# Altium PCB 4501-WB_AV_BMS_REV_A1.PcbDoc (part 1 of 2)
Units mil, origin at the board's own origin, x right, y up, seen from the top; angles counter-clockwise.
Board outline 3758.45 x 2809.6 mil, 2 copper layers (Top Layer, Bottom Layer), stack 65.792 mil thick; 104 components, 87 nets, 330 pads, 249 vias.
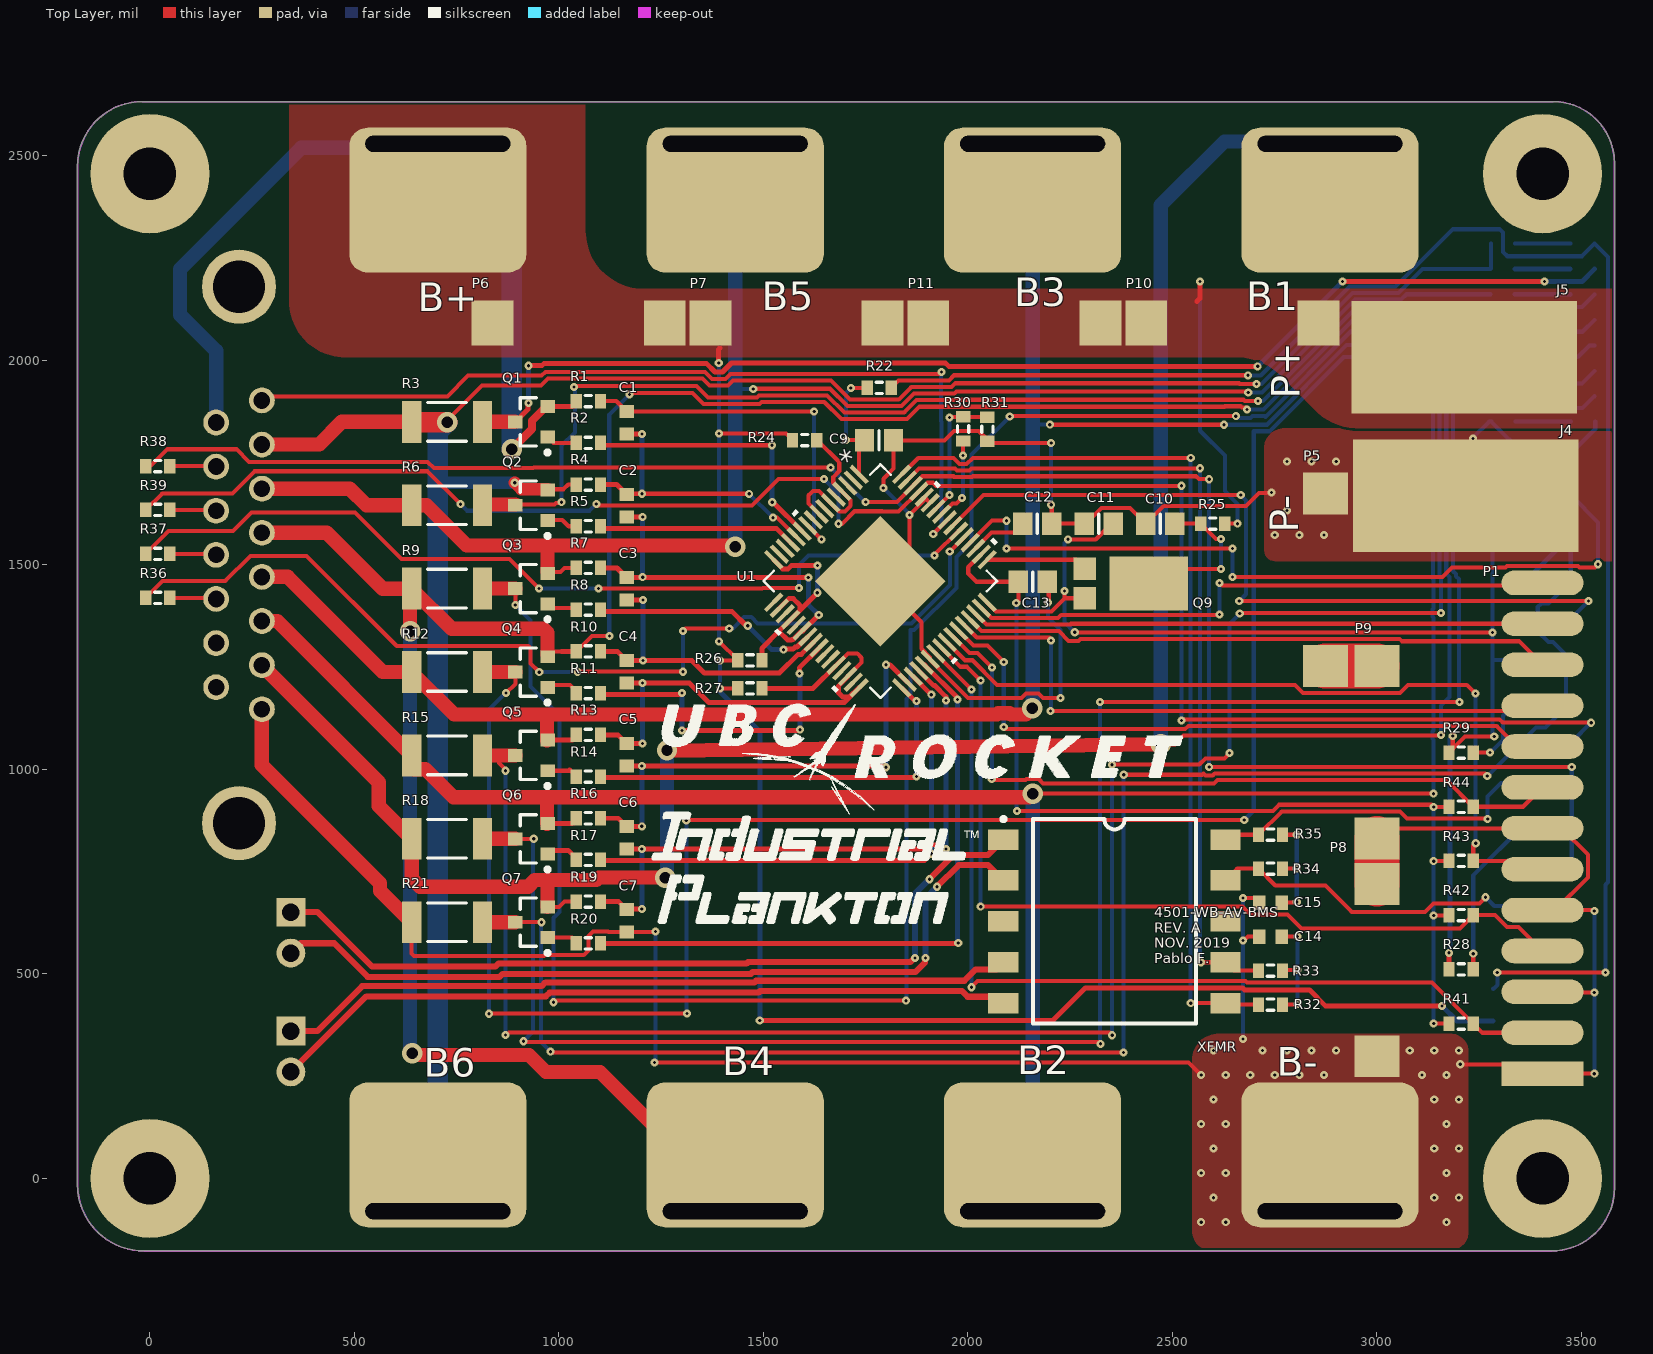
[diagram p0: Top Layer view]
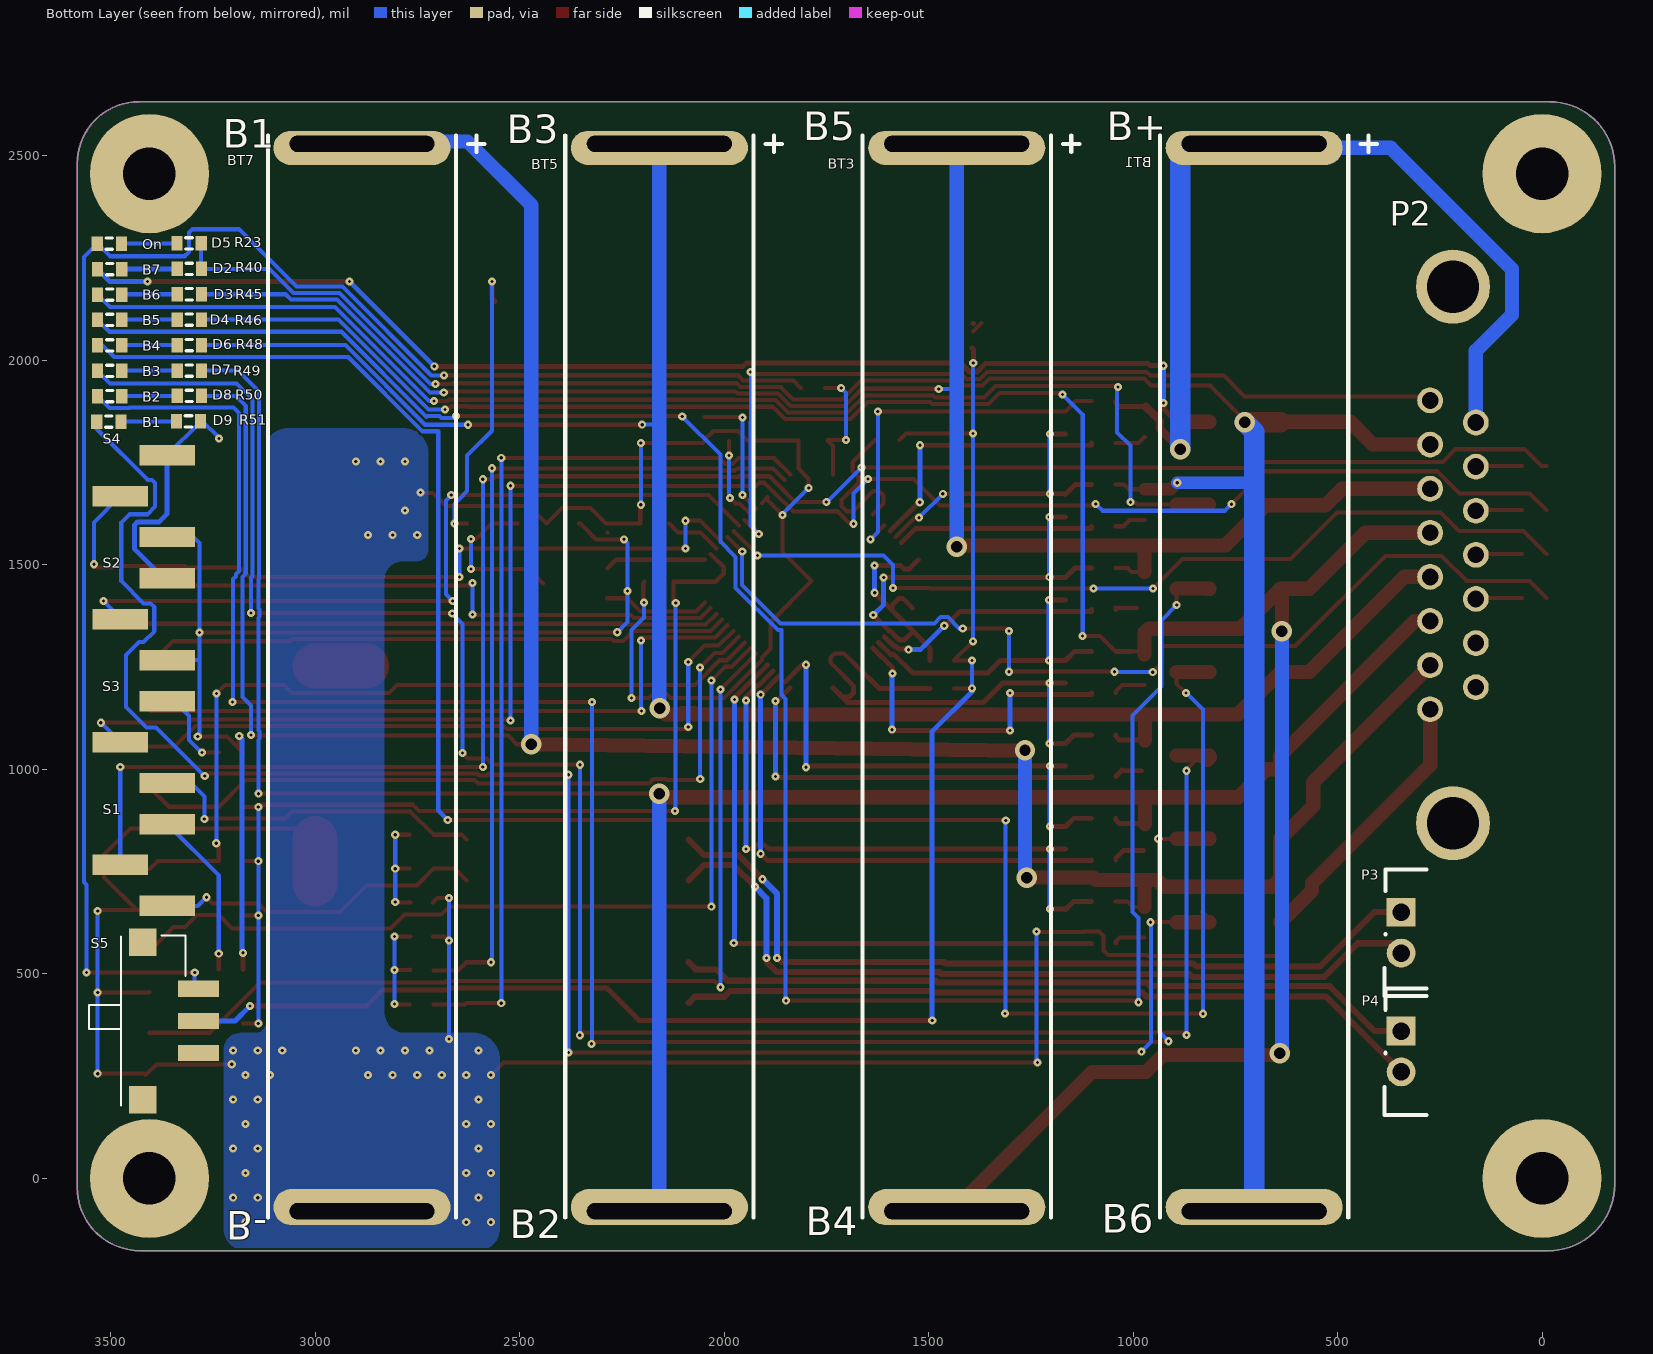
[diagram p1: Bottom Layer view, seen from below]

## Layer stack, top to bottom
Top Solder: solder mask 0.4, Solder Resist, Dk 3.5
Top Layer: signal copper 1.4
Dielectric 1: dielectric 62.9921, FR-4, Dk 4.8
Bottom Layer: signal copper 1.4
Bottom Solder: solder mask 0.4, Solder Resist, Dk 3.5

## Board outline
-15.2,-177.17 3427.8,-177.17 ccw(c3427.8,-23.67) 3581.3,-23.67 3581.3,2482.43 ccw(c3431.3,2482.43) 3431.3,2632.43 -19.3,2632.43 ccw(c-19.3,2474.59) -177.15,2474.59 -177.15,-15.22 ccw(c-15.2,-15.22)

## Design rules (kind name [scope] priority, off if disabled: settings)
Clearance [All] p1: gap=6 ignorepadtopadclearanceinfootprint=FALSE except(0: Arc-Hole Track-Hole SMDPad-Hole THPad-Hole Via-Hole Fill-Hole Poly-Hole Region-Hole Text-Hole)
ComponentClearance [All] p1: gap=0 collisioncheckmode=3 verticalgap=0.1 showdistances=FALSE
DiffPairsRouting [All] p1: maxlimit=10 minlimit=10 mostfreqgap=10 toplayer_minwidth=15 toplayer_maxwidth=15 toplayer_prefwidth=15 bottomlayer_minwidth=15 bottomlayer_maxwidth=15 bottomlayer_prefwidth=15 maxuncoupledlength=500
HoleSize [All] p1: absolutevalues=TRUE maxlimit=1000 minlimit=1 maxpercent=80.000 minpercent=20.000
MinimumSolderMaskSliver [All] p1: minsoldermaskwidth=1
PolygonConnect [All] p1: connectstyle=Direct reliefconductorwidth=10 reliefentries=4 polygonreliefangle="90 Angle" airgapwidth=10
RoomDefinition BMS_REV_A1 [InComponentClass('BMS_REV_A1')] p1: confinementstyle=ConfineIn formatcopy=TRUE lockcomponents=FALSE outline -406.65,-123.8 3624.85,-123.8 3624.85,2573 -406.65,2573
RoutingVias [All] p1: holewidth=7.87 width=19.87 viastyle="Through Hole" minholewidth=7.87 minwidth=19.87 maxholewidth=28 maxwidth=50
SilkToSilkClearance [All] p1: silktosilkclearance=1
SilkToSolderMaskClearance [IsPad] p1: minsilkscreentomaskgap=1 clearancetoexposedcopper=TRUE
SolderMaskExpansion [All] p1: expansion=4 istentingtop=FALSE
Width [All] p1: maxlimit=100 minlimit=10 preferedwidth=12
24 further rules are at their usual default settings.

## Classes and differential pairs
differential pair IB: +IB_P -IB_N
differential pair IA: +IA_P -IA_N

## Components (designator, comment, footprint, x,y, rotation, side; value= is the part's Value field where it differs from the comment)
BT1 "Battery" PCBComponent_1#1 704.05,-80.4 r90 bottom locked
BT3 "Battery" PCBComponent_1#1 1431.25,-80.4 r90 bottom locked
BT5 "Battery" PCBComponent_1#1 2158.45,-80.4 r90 bottom locked
BT7 "Battery" PCBComponent_1#1 2885.65,-80.4 r90 bottom locked
C1 "399-1092-1-ND" 1608[0603] 1165.4,1847.73 r90 top value=10nF
C2 "399-1092-1-ND" 1608[0603] 1165.4,1644.73 r90 top value=10nF
C3 "399-1092-1-ND" 1608[0603] 1165.4,1441.73 r90 top value=10nF
C4 "399-1092-1-ND" 1608[0603] 1165.4,1238.73 r90 top value=10nF
C5 "399-1092-1-ND" 1608[0603] 1165.4,1035.73 r90 top value=10nF
C6 "399-1092-1-ND" 1608[0603] 1165.4,832.73 r90 top value=10nF
C7 "399-1092-1-ND" 1608[0603] 1165.4,629.73 r90 top value=10nF
C9 "1276-1090-1-ND" 6-0805_N 1782.9,1804.33 r180 top value=100nF
C10 "1276-1090-1-ND" 6-0805_N 2470.22,1600.83 r0 top value=100nF
C11 "311-3498-1-ND" 6-0805_N 2319.96,1600.83 r0 top value=1uF
C12 "311-3498-1-ND" 6-0805_N 2169.7,1600.83 r180 top value=1uF
C13 "311-3498-1-ND" 6-0805_N 2158.9,1458.73 r180 top value=1uF
C14 "399-1092-1-ND" 1608[0603] 2739.95,591.08 r0 top value=10nF
C15 "399-1092-1-ND" 1608[0603] 2739.95,674.12 r0 top value=10nF
D2 "160-1435-1-ND" J1-0603 3502.5,2223.18 r180 bottom
D3 "160-1435-1-ND" J1-0603 3502.5,2161.02 r180 bottom
D4 "160-1435-1-ND" J1-0603 3502.5,2098.86 r180 bottom
D5 "LED0" J1-0603 3503.2,2285.33 r180 bottom
D6 "160-1435-1-ND" J1-0603 3502.5,2036.71 r180 bottom
D7 "160-1435-1-ND" J1-0603 3502.5,1974.55 r180 bottom
D8 "160-1435-1-ND" J1-0603 3502.5,1912.39 r180 bottom
D9 "160-1435-1-ND" J1-0603 3504.6,1850.23 r180 bottom
J4 "Socket" PCBComponent_1#2 3217,1668.73 r180 top
J5 "Socket" PCBComponent_1#2 3213.3,2007.83 r180 top
P1 "Header 13" PCBComponent_1#3 3405.05,255.91 r90 top
P2 "5747845-4" *5747845-4 217.9,868.63 r270 bottom
P3 "WM4900-ND" WM4900-ND 404.63,344.83 r180 bottom locked
P4 "WM4900-ND" WM4900-ND 404.63,54.13 r180 bottom locked
P5 "36-5104-ND" PCBComponent_1#4 2875,1253.13 r90 top
P6 "36-5104-ND" PCBComponent_1#4 1258.9,2091.53 r180 top
P7 "36-5104-ND" PCBComponent_1#4 1791.75,2091.53 r180 top
P8 "36-5104-ND" PCBComponent_1#4 3000.4,298.37 r90 top
P9 "36-5104-ND" PCBComponent_1#4 3000.5,831.37 r90 top
P10 "36-5104-ND" PCBComponent_1#4 2857.46,2091.53 r180 top
P11 "36-5104-ND" PCBComponent_1#4 2324.61,2091.53 r180 top
Q1 "BSS308PEH6327XTSA1CT-ND" SOT95P245X110-3N 932.95,1849.7 r180 top
Q2 "BSS308PEH6327XTSA1CT-ND" SOT95P245X110-3N 932.95,1645.8 r180 top
Q3 "BSS308PEH6327XTSA1CT-ND" SOT95P245X110-3N 932.95,1441.9 r180 top
Q4 "BSS308PEH6327XTSA1CT-ND" SOT95P245X110-3N 932.95,1238 r180 top
Q5 "BSS308PEH6327XTSA1CT-ND" SOT95P245X110-3N 932.95,1034.1 r180 top
Q6 "BSS308PEH6327XTSA1CT-ND" SOT95P245X110-3N 932.95,830.2 r180 top
Q7 "BSS308PEH6327XTSA1CT-ND" SOT95P245X110-3N 932.95,626.3 r180 top
Q9 "DXT5551P5-13CT-ND" DXT5551P5-13 2442.6,1454.63 r270 top
R1 "A129676CT-ND" J1-0603 1072.1,1900.4 r0 top value=100
R2 "A129543CT-ND" J1-0603 1072.1,1798.42 r0 top value=3.3k
R3 "A130642CT-ND" 12Z-2010 726.55,1849.7 r180 top value=33
R4 "A129676CT-ND" J1-0603 1072.1,1696.43 r0 top value=100
R5 "A129543CT-ND" J1-0603 1072.1,1594.44 r0 top value=3.3k
R6 "A130642CT-ND" 12Z-2010 726.55,1645.8 r180 top value=33
R7 "A129676CT-ND" J1-0603 1072.1,1492.45 r0 top value=100
R8 "A129543CT-ND" J1-0603 1072.1,1390.47 r0 top value=3.3k
R9 "A130642CT-ND" 12Z-2010 726.55,1441.9 r180 top value=33
R10 "A129676CT-ND" J1-0603 1072.1,1288.48 r0 top value=100
R11 "A129543CT-ND" J1-0603 1072.1,1186.49 r0 top value=3.3k
R12 "A130642CT-ND" 12Z-2010 726.55,1238 r180 top value=33
R13 "A129676CT-ND" J1-0603 1072.1,1084.5 r0 top value=100
R14 "A129543CT-ND" J1-0603 1072.1,982.52 r0 top value=3.3k
R15 "A130642CT-ND" 12Z-2010 726.55,1034.1 r180 top value=33
R16 "A129676CT-ND" J1-0603 1072.1,880.53 r0 top value=100
R17 "A129543CT-ND" J1-0603 1072.1,778.54 r0 top value=3.3k
R18 "A130642CT-ND" 12Z-2010 726.55,830.2 r180 top value=33
R19 "A129676CT-ND" J1-0603 1072.1,676.55 r0 top value=100
R20 "A129543CT-ND" J1-0603 1072.1,574.57 r0 top value=3.3k
R21 "A130642CT-ND" 12Z-2010 726.55,626.3 r180 top value=33
R22 "A129676CT-ND" J1-0603 1783.3,1932.93 r0 top value=100
R23 "RMCF2010JT33R0CT-ND" J1-0603 3308.4,2286.03 r180 bottom value=475
R24 "A129676CT-ND" J1-0603 1600.9,1805.13 r0 top value=100
R25 "A129676CT-ND" J1-0603 2598.83,1600.83 r0 top value=100
R26 "A129676CT-ND" J1-0603 1467.17,1266.33 r0 top value=100
R27 "A129676CT-ND" J1-0603 1467.17,1198.13 r0 top value=100
R28 "A129724CT-ND" J1-0603 3206.2,511.05 r180 top value=1M
R29 "A129724CT-ND" J1-0603 3206.2,1041.13 r180 top value=1M
R30 "RNCP0603FTD1K00CT-ND" J1-0603 1988.5,1832.43 r90 top value=1k
R31 "RNCP0603FTD1K00CT-ND" J1-0603 2047.65,1831.6 r270 top value=1k
R32 "311-2598-1-ND" J1-0603 2739.95,425 r0 top value=50
R33 "311-2598-1-ND" J1-0603 2739.95,508.04 r180 top value=50
R34 "311-2598-1-ND" J1-0603 2739.95,757.16 r0 top value=50
R35 "311-2598-1-ND" J1-0603 2739.95,840.2 r180 top value=50
R36 "A129676CT-ND" J1-0603 19.2,1419.33 r180 top value=100
R37 "A129676CT-ND" J1-0603 19.2,1526.8 r180 top value=100
R38 "A129676CT-ND" J1-0603 19.2,1741.73 r0 top value=100
R39 "A129676CT-ND" J1-0603 19.2,1634.27 r0 top value=100
R40 "RMCF2010JT33R0CT-ND" J1-0603 3307.7,2223.88 r0 bottom value=475
R41 "RNCP0603FTD10K0CT-ND" J1-0603 3206.2,378.53 r0 top value=10k
R42 "RNCP0603FTD10K0CT-ND" J1-0603 3206.2,643.57 r0 top value=10k
R43 "RNCP0603FTD10K0CT-ND" J1-0603 3206.2,776.09 r0 top value=10k
R44 "RNCP0603FTD10K0CT-ND" J1-0603 3206.2,908.61 r0 top value=10k
R45 "RMCF2010JT33R0CT-ND" J1-0603 3307.7,2161.72 r0 bottom value=475
R46 "RMCF2010JT33R0CT-ND" J1-0603 3307.7,2099.56 r0 bottom value=475
R48 "RMCF2010JT33R0CT-ND" J1-0603 3307.7,2037.41 r0 bottom value=475
R49 "RMCF2010JT33R0CT-ND" J1-0603 3307.7,1975.25 r0 bottom value=475
R50 "RMCF2010JT33R0CT-ND" J1-0603 3307.7,1913.09 r0 bottom value=475
R51 "RMCF2010JT33R0CT-ND" J1-0603 3309.8,1850.93 r0 bottom value=475
S1 "S9337-ND, SAM8981-ND" *TSM-103-01-L-SV 3419.18,766.33 r270 bottom
S2 "S9337-ND, SAM8981-ND" *TSM-103-01-L-SV 3419.32,1367.33 r270 bottom
S3 "S9337-ND, SAM8981-ND" *TSM-103-01-L-SV 3419.18,1066.63 r270 bottom
S4 "S9337-ND, SAM8981-ND" *TSM-103-01-L-SV 3419.32,1668.13 r270 bottom
S5 "SS312SAH4-R" *SW_SS312SAH4-R 3344.83,384.75 r180 bottom
U1 "LTC6812ILWE-1#3ZZPBF-ND" "LQFP64_LWE_A - duplicate" 1786.1,1460.33 r315 top value=Value
XFMR "1840-1032-1-ND" HM2100NLT 2087.1,828.33 r0 top

## Footprints (in the part's own frame and the unit in brackets; to place one, negate y for a bottom-side part, rotate by r counter-clockwise, add the part's x,y. Pads: shape width x height; smd on the part's side, far side on the other; paste and mask are expansions set on the pad)
6-0805_N [mm] "Chip Resistor, Body 2.0x1.2mm, IPC Medium Density"
  rect 1.2x1.4 smd: 1(-0.9,0) 2(0.9,0)
  silkscreen extent 0,-0.6 0,0.6, body extent -1.07,-0.7 1.07,0.7, height 0.7
12Z-2010 [mm] "Chip Resistor, Body 5.0x2.5mm, IPC High Density"
  rect 1.2x2.6 smd: 1(-2.2,0) 2(2.2,0)
  silkscreen extent -1.2,-1.2 1.2,1.2, body extent -2.58,-1.33 2.58,1.33, height 0.9
1608[0603] [mm] "Chip Capacitor, Body 1.6x0.8mm, IPC High Density"
  rect 0.8x0.9 smd: 1(-0.7,0) 2(0.7,0)
  body extent -0.87,-0.48 0.87,0.48, height 1.3
*5747845-4 [mm]
  round 1.6 hole 1.04: 1(-26.25,-1.42) 2(-23.51,-1.42) 3(-20.77,-1.42) 4(-18.03,-1.42) 5(-15.29,-1.42) 6(-12.55,-1.42) 7(-9.81,-1.42) 8(-7.07,-1.42) 9(-24.88,1.42) 10(-22.14,1.42) 11(-19.4,1.42) 12(-16.66,1.42) 13(-13.92,1.42) 14(-11.18,1.42) 15(-8.44,1.42)
  round 4.6 hole 3.25: 16(0,0) 17(-33.32,0)
  body extent -36.3,-3.03 3.07,15.86, height 12.62
*SW_SS312SAH4-R [mm]
  rect 2.55x1 smd: 1(1.525,-2) 2(1.525,0) 3(1.525,2)
  rect 1.7x1.7 smd: P$1(-1.95,-4.9) P$2(-1.95,4.9)
  silkscreen extent -5.3,-5.25 0.7,5.3, body extent -5.27,-5.25 2.12,5.25, height 3.1
*TSM-103-01-L-SV [mm]
  rect 1.27x3.43 smd: 1(-2.54,1.46) 2(0,-1.46) 3(2.54,1.46)
  body extent -3.94,-2.64 3.68,2.64, height 9.78
DXT5551P5-13 [mm]
  rect 1.4x1.39 smd: 1(0.92,-3.982) 2(-0.92,-3.982)
  rect 3.36x4.86 smd: 3(0,0)
HM2100NLT [mm]
  rect 1.89x1.27 smd: 1(0,0) 2(0,-2.54) 3(0,-5.08) 4(0,-7.62) 5(0,-10.16) 6(13.79,-10.16) 7(13.79,-7.62) 8(13.79,-5.08) 9(13.79,-2.54) 10(13.79,0)
  silkscreen extent -0.13,-11.43 11.96,1.4, body extent -0.5,-12.3 14.47,2.4, height 3.3
J1-0603 [mm] "Chip Resistor, Body 1.6x0.8mm, IPC High Density"
  rect 0.7x0.9 smd: 1(-0.75,0) 2(0.75,0)
  silkscreen extent -0.2,-0.35 0.2,0.35, body extent -0.85,-0.48 0.85,0.48, height 0.9
"LQFP64_LWE_A - duplicate" [mm]
  rect 1.461x0.27 smd paste+0 mask+0: 1(-5.625,3.75) 2(-5.625,3.25) 3(-5.625,2.75) 4(-5.625,2.25) 5(-5.625,1.75) 6(-5.625,1.25) 7(-5.625,0.75) 8(-5.625,0.25) 9(-5.625,-0.25) 10(-5.625,-0.75) 11(-5.625,-1.25) 12(-5.625,-1.75) 13(-5.625,-2.25) 14(-5.625,-2.75) 15(-5.625,-3.25) 16(-5.625,-3.75) 33(5.625,-3.75) 34(5.625,-3.25) 35(5.625,-2.75) 36(5.625,-2.25) 37(5.625,-1.75) 38(5.625,-1.25) 39(5.625,-0.75) 40(5.625,-0.25) 41(5.625,0.25) 42(5.625,0.75) 43(5.625,1.25) 44(5.625,1.75) 45(5.625,2.25) 46(5.625,2.75) 47(5.625,3.25) 48(5.625,3.75)
  rect 0.27x1.461 smd paste+0 mask+0: 17(-3.75,-5.625) 18(-3.25,-5.625) 19(-2.75,-5.625) 20(-2.25,-5.625) 21(-1.75,-5.625) 22(-1.25,-5.625) 23(-0.75,-5.625) 24(-0.25,-5.625) 25(0.25,-5.625) 26(0.75,-5.625) 27(1.25,-5.625) 28(1.75,-5.625) 29(2.25,-5.625) 30(2.75,-5.625) 31(3.25,-5.625) 32(3.75,-5.625) 49(3.75,5.625) 50(3.25,5.625) 51(2.75,5.625) 52(2.25,5.625) 53(1.75,5.625) 54(1.25,5.625) 55(0.75,5.625) 56(0.25,5.625) 57(-0.25,5.625) 58(-0.75,5.625) 59(-1.25,5.625) 60(-1.75,5.625) 61(-2.25,5.625) 62(-2.75,5.625) 63(-3.25,5.625) 64(-3.75,5.625)
  rect 5.74x5.74 smd paste-2.857 mask+0: 65(0,0)
  silkscreen extent -6.86,-6.86 6.86,6.86, body extent 0,0 0.25,0.25, height 0.25
PCBComponent_1#1 [mm]
  rrect100% 2.125x11 / inner rrect25% 0x0 / far side rrect0% 0x0 all layers, no hole: 1(66.04,0)
  rrect0% 0x0 / inner rrect0% 0x0 / far side rrect25% 9x11 hole 9 slot 1 at 0 deg copper offset -3.5,0: 1(66.294,0)
  rrect25% 0x0 / inner rrect25% 0x0 / far side rrect25% 9x11 hole 9 slot 1 at 0 deg copper offset 3.5,0: 2(0,0)
  rrect100% 2.25x11 / inner rrect25% 0x0 / far side rrect0% 0x0 all layers, no hole: 2(0.254,0)
  silkscreen extent -0.38,-7.62 66.8,5.84, body extent 0.63,-9.2 65.63,9.2, height 18.6
PCBComponent_1#2 [mm]
  rect 14x7 smd: 1(0,0)
PCBComponent_1#3 [mm]
  rect 1.524x5.08 smd: 1(0,0)
  oval 1.524x5.08 smd: 2(2.54,0) 3(5.08,0) 4(7.62,0) 5(10.16,0) 6(12.7,0) 7(15.24,0) 8(17.78,0) 9(20.32,0) 10(22.86,0) 11(25.4,0) 12(27.94,0) 13(30.48,0)
PCBComponent_1#4 [mm]
  rect 2.6x2.8 smd: 1(0,0) 2(10.7,0)
  body extent -0.94,-1.15 11.36,1.15, height 1.8
SOT95P245X110-3N [mm] "SOT23, 3-Leads, Body 2.90x2.45mm, Pitch 0.95mm, IPC Medium Density"
  rect 0.9x0.8 smd: 1(-1,0.95) 2(-1,-0.95) 3(1,0)
  silkscreen extent -1.13,-1.5 0.7,2.02, body extent -0.7,-1.5 0.7,1.5, height 1.1
WM4900-ND [mm]
  rect 1.79x1.79 hole 1.09: 1(1.524,7.772)
  round 1.79 hole 1.09: 2(1.524,5.232)
  silkscreen extent 0.48,2.57 3.1,10.42, body extent 0.89,2.84 14.48,10.21, height 7.11

## Part data
BT1 BT3 BT5 BT7: "Multicell Battery", LatestRevisionDate=17-Jul-2002, LatestRevisionNote="Re-released for DXP Platform.", PackageDescription="Battery; 2 Leads", PackageReference=BAT-2, Published=24-Mar-1999, Publisher="Altium Limited"
C1 C2 C3 C4 C5 C6 C7 C9 C10 C11 C12 C13 C14 C15: library part "Cap Semi", "Capacitor (Semiconductor SIM Model)", LatestRevisionDate=29-May-2009, LatestRevisionNote="IPC-7351 Footprint Added.", PackageDescription="Chip Capacitor", PackageReference=C1206, Published=8-Jun-2000, Publisher="Altium Limited"
  C1 C2 C3 C4 C5 C6 C7 C14 C15: SPN=399-1092-1-ND
  C9 C10: SPN=1276-1090-1-ND
  C11 C12 C13: SPN=311-3498-1-ND
D2 D3 D4 D6 D7 D8 D9: library part LED0, "Typical INFRARED GaAs LED", LatestRevisionDate=08-Jul-2005, LatestRevisionNote="Mech Layer 1 removed.", PackageDescription="LED; 2 Leads", PackageReference=LED-0, Published=8-Jun-2000, Publisher="Altium Limited", SPN=160-1435-1-ND
D5: "Typical INFRARED GaAs LED", LatestRevisionDate=08-Jul-2005, LatestRevisionNote="Mech Layer 1 removed.", PackageDescription="LED; 2 Leads", PackageReference=LED-0, Published=8-Jun-2000, Publisher="Altium Limited", SPN=160-1646-1-ND
P1: "Header, 13-Pin", LatestRevisionDate=17-Jul-2002, LatestRevisionNote="Re-released for DXP Platform.", Publisher="Altium Limited"
P2: library part "Header 7X2A", "Header, 7-Pin, Dual row", LatestRevisionDate=17-Jul-2002, LatestRevisionNote="Re-released for DXP Platform.", Publisher="Altium Limited"
P3 P4 P5 P6 P7 P8 P9 P10 P11: library part "Header 2", "Header, 2-Pin", LatestRevisionDate=17-Jul-2002, LatestRevisionNote="Re-released for DXP Platform.", Publisher="Altium Limited"
  P3 P4: SPN=WM4900-ND
  P5 P6 P7 P8 P9 P10 P11: SPN=36-5104-ND
Q1 Q2 Q3 Q4 Q5 Q6 Q7: library part MOSFET-P, "P-Channel MOSFET", LatestRevisionDate=17-Jul-2002, LatestRevisionNote="Re-released for DXP Platform.", PackageDescription="TO, Flat Index; 3 In-Line, Axial Leads; Body Dia. 4.6mm; Lead Dia. 0.5 mm (max)", PackageReference=E3, PackageVersion=1995/1996, Published=8-Jun-2000, Publisher="Altium Limited", SPN=BSS308PEH6327XTSA1CT-ND
Q9: library part 2N3904, "NPN General Purpose Amplifier", ComponentLink1Description="Manufacturer Link", ComponentLink1URL=http://www.fairchildsemi.com/, ComponentLink2Description=Datasheet, ComponentLink2URL=http://www.fairchildsemi.com/ds/2N%2F2N3904.pdf, DatasheetVersion=1997, LatestRevisionDate=15-Jan-2003, LatestRevisionNote="PCB Footprint 'BCY-W3/D4.7' replaced", PackageDescription="TO, Flat Index; 3 In-Line, Axial Leads; Body Dia. 4.5mm; Leads 0.51 x 0.48 mm (max)", PackageReference=TO-92A, PackageVersion=Sep-1998, Published=8-Jun-2000, Publisher="Altium Limited", SPN=DXT5551P5-13CT-ND
R1 R2 R3 R4 R5 R6 R7 R8 R9 R10 R11 R12 R13 R14 R15 R16 R17 R18 R19 R20 R21 R22 R23 R24 R25 R26 R27 R28 R29 R30 R31 R32 R33 R34 R35 R36 R37 R38 R39 R40 R41 R42 R43 R44 R45 R46 R48 R49 R50 R51: library part Res3, "Resistor", LatestRevisionDate=29-May-2009, LatestRevisionNote="IPC-7351 Footprint Added.", PackageDescription="Chip Resistor", PackageReference=J1-0603, Published=8-Jun-2000, Publisher="Altium Limited"
  R1 R4 R7 R10 R13 R16 R19 R22 R24 R25 R27 R36 R37 R38 R39: Parameter 1=A129676CT-ND, SPN=A129676CT-ND
  R2 R5 R8 R11 R14 R17 R20: SPN=A129543CT-ND
  R3 R6 R9 R12 R15 R18 R21: SPN=A130642CT-ND
  R23 R40 R45 R46 R48 R49 R50 R51: SPN=RMCF2010JT33R0CT-ND
  R26: SPN=A129676CT-ND
  R28 R29: SPN=A129724CT-ND
  R30 R31: SPN=RNCP0603FTD1K00CT-ND
  R32 R33 R34 R35: SPN=311-2598-1-ND
  R41 R42 R43 R44: SPN=RNCP0603FTD10K0CT-ND
S1 S2 S3 S4: library part SW-SPDT, "SPDT Subminiature Toggle Switch, Right Angle Mounting, Vertical Actuation", ComponentLink1Description="Manufacturer Link", ComponentLink1URL=http://www.apem.com, DatasheetVersion=05-Dec-2000, LatestRevisionDate=17-Dec-2003, LatestRevisionNote="Schematic revised, PCB Footprint replaced.", PackageDescription="Switch; 4 Leads", PackageReference=TL36WW15050, Published=24-Mar-1999, Publisher="Altium Limited", SPN="S9337-ND, SAM8981-ND"
S5: "Switch Slide ON None ON SPDT Side Slide 0.1A 28VAC 28VDC 0.4VA 10000Cycles Gull Wing SMD T/R", Package=None, Availability=Unavailable, MF="NKK Switches", MP=SS312SAH4-R, Price=None, SnapEDA_Link=https://www.snapeda.com/parts/SS312SAH4-R/NKK%20Switches/view-part/?ref=snap, SPN=‎360-2924-1-ND‎
U1: library part LTC6812HLWE-1, "No Description Available", Copyright="Copyright (C) 2018 Accelerated Designs. All rights reserved", RefDes=RefDes, SPN=LTC6812ILWE-1#3ZZPBF-ND, Type=DEV
XFMR: library part "Header 5X2A", "Header, 5-Pin, Dual row / HM2100NLT", LatestRevisionDate=17-Jul-2002, LatestRevisionNote="Re-released for DXP Platform.", Publisher="Altium Limited", SPN=1840-1032-1-ND
J4 J5: LatestRevisionDate=17-Jul-2002, LatestRevisionNote="Re-released for DXP Platform.", Publisher="Altium Limited"

## Free pads (board coordinates)
  round 291.34 hole 128: 1(0,0) 1(0,2456.53) 1(3405.33,0) 1(3405.33,2456.53)

## Via types
v1: diameter 19.87, hole 7.87, Top Layer to Bottom Layer, tented both sides, 230 vias
v2: diameter 50, hole 28, Top Layer to Bottom Layer, tented both sides, 10 vias
v3: diameter 19.87, hole 7.87, Top Layer to Bottom Layer, 9 vias

## Nets (pads, with @x,y where several pads share a name; then routed paths per layer and width w, separated by ;. In a path a pad name is that pad's centre, name@x,y a point inside that pad or via, vN(x,y) a via of type N, cw(c..) or ccw(c..) an arc to the next point about the centre after c; other vN are vias at no path point)
C1: C6.1 C7.2 R19.2 U1.36 | length 1511.4
  Top Layer w12: R19.2@1101.63,676.55 1146.14,676.55 C7.2@1165.4,657.29 1166.4,658.3 v1(1202.84,658.3) ; C6.1@1165.4,805.18 v1(1202.84,805.18) 1891.12,805.18 1901.61,815.67 1919.79,815.67 1930.28,805.18 v1(1946.34,805.18) ; U1.36@1880.06,1241.1 1916.59,1204.57 1919.79,1204.57 1946.34,1178.02 v1(1946.34,1168.29)
  Bottom Layer w12: v1(1202.84,658.3) v1(1202.84,805.18) ; v1(1946.34,805.18) v1(1946.34,1168.29)
C2: C5.1 C6.2 R16.2 U1.34 | length 1215.2
  Top Layer w12: R16.2@1101.63,880.53 1145.17,880.53 C6.2@1165.4,860.29 1202.48,860.29 v1(1202.86,860.68) ; C5.1@1165.4,1008.18 v1(1202.86,1008.18) 1799.47,1008.18 1799.9,1007.75 v1(1799.9,1005.13) ; v1(1799.9,1255.83) 1809.65,1255.83 U1.34@1852.22,1213.26
  Bottom Layer w12: v1(1202.86,860.68) v1(1202.86,1008.18) ; v1(1799.9,1005.13) v1(1799.9,1255.83)
C3: C4.1 C5.2 R13.2 R27.2 U1.28 U1.30 U1.32 | length 1317.3
  Top Layer w10: U1.28@1678.22,1255.02 1706.5,1283.3 1729.64,1283.3 1740,1272.93 1740,1261.12 U1.30@1706.06,1227.18
  Top Layer w12: R13.2@1101.63,1084.5 1144.19,1084.5 C5.2@1165.4,1063.29 v1(1204.16,1063.29) ; C4.1@1165.4,1211.18 v1@1204,1211.18 ; v1@1204.16,1211.18 1318.96,1211.18 1366.6,1163.53 1698.09,1163.53 U1.32@1733.9,1199.35 1732.93,1199.35 1710.76,1177.17 1693.58,1177.17 1683.89,1186.87 1683.89,1204.04 1706.06,1226.22 U1.30@1706.06,1227.18 ; R27.2@1496.7,1198.13 1621.34,1198.13 U1.28@1678.22,1255.02
  Bottom Layer w12: v1(1204.16,1063.29) v1(1204.16,1210.98)
C6: C3.1 C4.2 R10.2 U1.24 | length 763.4
  Top Layer w12: R10.2@1101.63,1288.48 1143.21,1288.48 C4.2@1165.4,1266.29 v1@1205.76,1266.29 ; C3.1@1165.4,1414.18 v1(1205.94,1414.18) ; v1@1205.1,1265.63 v1@1205.76,1266.29 ; v1(1205.94,1266.48) v1@1205.76,1266.29 ; U1.24@1622.55,1310.7 1593.08,1281.23 1585,1281.23 1539.3,1235.53 1355.82,1235.53 1325.06,1266.29 v1@1205.76,1266.29
  Bottom Layer w12: v1(1205.94,1266.48) v1(1205.94,1414.18)
C7: C2.1 C3.2 R7.2 R26.2 U1.16 U1.18 U1.20 U1.22 | length 1430.3
  Top Layer w12: R7.2@1101.63,1492.45 1142.24,1492.45 C3.2@1165.4,1469.29 v1@1205.54,1469.29 ; C2.1@1165.4,1617.18 v1(1204.86,1617.18) ; v1(1204.86,1469.98) v1@1205.54,1469.29 ; v1@1205.8,1469.03 v1@1205.54,1469.29 ; R26.2@1496.7,1266.33 1496.7,1296.21 1539.3,1338.81 ; U1.16@1525.11,1512.53 1547.29,1490.35 1560.58,1490.35 1568.96,1498.73 v1(1632.4,1498.73) ; U1.18@1539.03,1394.22 1562.23,1417.42 1573.48,1417.42 1589.05,1401.85 1589.05,1388.56 ; v1(1610.02,1469.33) v1(1610.02,1469.33) v1@1205.54,1469.29 ; v1(1632,1431.93) v1@1632.43,1431.93 ; v1@1632.6,1432.11 v1@1632.43,1431.93 ; v1(1635.4,1377.33) 1596.61,1338.54 U1.22@1594.71,1338.54 1593.74,1338.54 1572.43,1317.23 1569.57,1317.23 1568.7,1316.36 1559.24,1316.36 1539.3,1336.3 1539.3,1338.81 ; 1539.3,1338.81 U1.20@1566.87,1366.38 1589.05,1388.56 ; 1589.05,1388.56 v1@1632.43,1431.93
  Bottom Layer w12: v1(1204.86,1469.98) v1(1204.86,1617.18) ; v1(1610.02,1469.33) 1610.02,1402.72 v1(1635.4,1377.33) ; v1(1632,1431.93) 1632,1499.13 v1(1632.4,1498.73)
C11: C1.1 C2.2 R4.2 U1.12 | length 717.5
  Top Layer w10: v1(1203,1673.83) 1465.2,1673.83 v1(1465.3,1673.73) ; v1(1523.6,1615.43) 1533.56,1615.43 U1.12@1580.79,1568.21
  Top Layer w12: R4.2@1101.63,1696.43 1141.26,1696.43 C2.2@1165.4,1672.29 1166.94,1673.83 v1(1203,1673.83) ; C1.1@1165.4,1820.18 1202.96,1820.18 v1(1203,1820.13)
  Bottom Layer w10: v1(1465.3,1673.73) v1(1523.6,1615.43)
  Bottom Layer w12: v1(1203,1673.83) v1(1203,1820.13)
C12: C1.2 R1.2 U1.10 | length 901.1
  Top Layer w10: R1.2@1101.63,1900.4 1140.29,1900.4 C1.2@1165.4,1875.29 v1(1624.24,1875.29) ; U1.10@1608.63,1596.05 1608.79,1596.05 v1(1642.4,1562.43)
  Bottom Layer w10: v1(1624.24,1875.29) 1624.24,1580.59 v1(1642.4,1562.43)
Cell1: BT7.1 P2.7 Q7.2 R18.2 R19.1 R50.1 | length 6406.6
  Top Layer w10: 971.25,729.33 972.32,728.26 ; Q7.2@972.32,663.71 1000.78,663.71 1013.63,676.55 R19.1@1042.57,676.55 ; v2(2471.35,1061.33) 2506.5,1061.33 2527.66,1082.5 3155.26,1082.5 v1(3156.6,1083.83)
  Top Layer w12: 1001.29,729.33 1001.8,728.83
  Top Layer w35: P2.7@273.81,1254.86 559.9,968.76 559.9,910.24 R18.2@639.94,830.2 639.94,733.54 660.44,713.03 924.9,713.03 941.2,729.33 971.25,729.33 1001.29,729.33 1091.42,729.33 1097.62,735.53 v2(1260.2,735.53) ; Q7.2@972.32,663.71 972.32,728.26 ; v2(1264.4,1046.23) 1265.1,1045.53 v2(2471.35,1061.33)
  Bottom Layer w10: v1(3156.6,1083.83) 3156.6,1155.63 3177.74,1176.77 3177.74,1470.7 3169.7,1478.73 3169.7,1888.33 3194.46,1913.09 R50.1@3278.17,1913.09
  Bottom Layer w35: v2(1260.2,735.53) 1264.4,739.73 v2(1264.4,1046.23) ; v2(2471.35,1061.33) 2471.35,2379.39 2627.37,2535.4 2869.85,2535.4 BT7.1@2885.65,2519.6
Cell2: BT5.2 P2.6 Q6.2 R15.2 R16.1 R49.1 | length 5369.6
  Top Layer w10: v2(2158.45,940.58) v1(3138.55,940.58)
  Top Layer w12: Q6.2@970.85,867.24 1033.22,867.24 1042.57,876.59 R16.1@1042.57,880.53 ; 970.85,928.87 973.72,931.73
  Top Layer w35: P2.6@273.81,1362.73 311.31,1362.73 R15.2@639.94,1034.1 639.94,1006.54 646.06,1000.42 673.62,1000.42 742.31,931.73 973.72,931.73 2149.61,931.73 v2(2158.45,940.58) ; Q6.2@970.85,867.24 970.85,928.87
  Bottom Layer w10: v1(3138.55,940.58) 3138.55,1072.27 3135.66,1075.16 3135.66,1092.51 3138.55,1095.4 3138.55,1370.67 3135.86,1373.36 3135.86,1390.71 3138.55,1393.4 3138.55,1464.63 3137.7,1465.48 3137.7,1912.06 3138.55,1912.92 3138.55,1925.29 3188.51,1975.25 R49.1@3278.17,1975.25
  Bottom Layer w35: BT5.2@2158.45,-70.4 v2(2158.45,940.58)
Cell3: BT5.1 P2.5 Q5.2 R12.2 R13.1 R48.1 | length 4736.8
  Top Layer w10: v1(2200.5,1842.83) 2200.67,1842.66 v1(2626.43,1842.66)
  Top Layer w12: 970.85,1132.49 972.4,1134.03 ; Q5.2@979.57,1071.51 1033.51,1071.51 1042.57,1080.57 R13.1@1042.57,1084.5
  Top Layer w35: P2.5@273.81,1470.6 336.93,1470.6 569.53,1238 R12.2@639.94,1238 743.91,1134.03 972.4,1134.03 972.46,1133.98 2071.16,1133.98 2074.05,1136.87 2101.75,1136.87 2104.64,1133.98 2141.74,1133.98 v2(2157.5,1149.73) ; Q5.2@970.85,1071.51 970.85,1132.49
  Bottom Layer w10: 2158.45,1843.33 2158.95,1842.83 v1(2200.5,1842.83) ; v1(2626.43,1842.66) 2731.2,1842.66 2925.94,2037.41 R48.1@3278.17,2037.41
  Bottom Layer w35: v2(2157.5,1149.73) 2158.45,1150.69 2158.45,1843.33 BT5.1@2158.45,2519.6
Cell4: BT3.2 P2.4 Q4.2 R9.2 R10.1 R46.1 | length 5970
  Top Layer w10: Q4.2@972.32,1280.82 979.98,1288.48 1006.68,1288.48 ; R10.1@1042.57,1288.48 1080.53,1326.43 v1(1123.7,1326.43) ; v1(1172.4,1916.33) 1172.4,1920.43 1326.8,1920.43 1354.14,1893.1 1490.6,1893.1 1496.14,1898.63 1648.87,1898.63 1691.29,1856.22 1851.05,1856.22 1881.57,1886.74 2627.37,1886.74 2628.5,1887.87 2667.23,1887.87 2670.47,1884.62 2681.01,1884.62 2682.9,1882.73 v1(2682.9,1879.63)
  Top Layer w12: 1006.68,1288.48 R10.1@1042.57,1288.48
  Top Layer w35: P2.4@273.81,1578.48 432.66,1578.48 569.23,1441.9 R9.2@639.94,1441.9 ; v2(636.15,1337.73) 636.15,1438.11 R9.2@639.94,1441.9 ; v2(641,305.93) 645.2,301.73 927.05,301.73 968.55,260.23 1100.62,260.23 BT3.2@1431.25,-70.4 ; Q4.2@972.32,1280.82 972.32,1334.01 962.5,1343.83 738.01,1343.83 R9.2@639.94,1441.9
  Bottom Layer w10: v1(1123.7,1326.43) 1123.1,1327.03 1123.1,1867.03 v1(1172.4,1916.33) ; v1(2682.9,1879.63) 2682.94,1879.6 2722.88,1879.6 2942.85,2099.56 R46.1@3278.17,2099.56
  Bottom Layer w35: v2(636.15,1337.73) 636.15,310.79 v2(641,305.93)
Cell5: BT3.1 P2.3 Q3.2 R6.2 R7.1 R45.1 | length 4312.6
  Top Layer w10: 970.85,1547.33 972.32,1545.86 ; Q3.2@972.32,1482.91 1004.09,1482.91 1013.63,1492.45 R7.1@1042.57,1492.45 ; v1(1475.3,1930.03) 1474.7,1930.63 1663.26,1930.63 1705.68,1888.22 1837.79,1888.22 1868.31,1918.74 1966.87,1918.74 1972.2,1924.07 2683.26,1924.07 v1(2685.77,1921.56)
  Top Layer w35: P2.3@273.81,1686.35 488.88,1686.35 529.43,1645.8 R6.2@639.94,1645.8 676.43,1645.8 774.9,1547.33 970.85,1547.33 1428.61,1547.33 v2(1431.25,1544.69) ; Q3.2@972.32,1482.91 972.32,1545.86
  Bottom Layer w10: 1431.25,1932.53 1433.75,1930.03 v1(1475.3,1930.03) ; v1(2685.77,1921.56) 2719.59,1921.56 2946.86,2148.83 3059.25,2148.83 3072.14,2161.72 R45.1@3278.17,2161.72
  Bottom Layer w35: v2(1431.25,1544.69) 1431.25,1932.53 BT3.1@1431.25,2519.6
Cell6: BT1.2 P2.2 Q2.2 R3.2 R4.1 R23.2 R40.1 | length 5595.2
  Top Layer w10: v2(727.5,1849.03) 727.5,1854.39 811.84,1938.73 956.76,1938.73 973.91,1955.89 1350.89,1955.89 1368.04,1938.73 1413.89,1938.73 1426.13,1950.97 1665.55,1950.97 1712.31,1904.22 1831.16,1904.22 1861.69,1934.74 1960.24,1934.74 1969.67,1944.17 2663.06,1944.17 2664.74,1942.5 v1(2706.1,1942.5) ; Q2.2@972.32,1685.01 1011.53,1685.01 1022.95,1696.43 R4.1@1042.57,1696.43
  Top Layer w30: v3(892.11,1700.74) 907.85,1685.01 Q2.2@972.32,1685.01
  Top Layer w35: P2.2@273.81,1794.23 413.89,1794.23 469.37,1849.7 R3.2@639.94,1849.7
  Top Layer w50: R3.2@640.61,1849.03 v2(727.5,1849.03)
  Bottom Layer w10: 704.05,1687.93 704.82,1687.16 ; 704.05,1722.8 726.11,1700.74 ; v2@724.5,1852.03 v2(727.5,1849.03) ; v1(2706.1,1942.5) 2717.9,1942.5 2940.24,2164.83 3052.63,2164.83 3111.67,2223.88 R40.1@3278.17,2223.88 3278.87,2224.58 R23.2@3278.87,2286.03
  Bottom Layer w30: 726.11,1700.74 v3(892.11,1700.74)
  Bottom Layer w50: BT1.2@704.05,-70.4 704.05,1687.93 704.05,1722.8 704.05,1825.59 v2(727.5,1849.03)
CS: R39.1 S3.2 U1.61 | length 4427.8
  Top Layer w10: R39.1@-10.33,1634.27 30.31,1674.91 202.27,1674.91 256.2,1728.85 678.79,1728.85 v1(759.2,1648.43) ; v1(1091.6,1648.73) 1094.79,1645.55 1472.31,1645.55 1536.7,1709.93 v1(1648.2,1709.93) ; v1(1684,1600.43) 1691.88,1600.43 1722.57,1631.13 1790.66,1631.13 1791.35,1630.43 1830.93,1630.43 U1.61@1880.06,1679.57 1901.23,1700.74 1915.11,1700.74 1922.52,1693.33 v1(2522.7,1693.33) ; v1(2522.7,1119.43) 2525.64,1122.37 3299.79,1122.37 3308.03,1114.13 v1(3524.16,1114.13)
  Bottom Layer w10: v1(759.2,1648.43) 775.22,1632.41 1075.28,1632.41 v1(1091.6,1648.73) ; v1(1648.2,1709.93) 1684,1674.13 v1(1684,1600.43) ; v1(2522.7,1119.43) v1(2522.7,1693.33) ; S3.2@3476.66,1066.63 v1(3524.16,1114.13)
DRIVE: Q9.2 U1.49 | length 247.7
  Top Layer w10: U1.49@2047.09,1512.53 2264.15,1512.53 Q9.2@2285.83,1490.86
GND: BT7.2 C7.1 C9.1 C10.1 C11.1 C12.1 C13.1 C14.1 C15.1 J4.1 P1.1 P1.3 P1.5 P1.7 P2.8 P5.2 P8.1 P8.2 P9.1 R21.2 R31.2 R51.1 S2.1 S4.1 U1.38 U1.59 U1.60 U1.65 | length 8501
  Top Layer w10: R21.2@639.94,626.3 639.94,549.36 645.8,543.5 964.03,543.5 966.38,545.85 1060.91,545.85 1072.1,557.04 1072.1,592.09 1083.29,603.28 1119.96,603.28 1121.07,602.18 C7.1@1165.4,602.18 1235.24,602.18 v1(1236.5,603.43) ; v1(1233.7,283.53) 2539.82,283.53 v1(2570.55,252.8) ; v1(1793.4,1688.03) 1793.4,1710.63 1818.33,1735.57 C9.1@1818.33,1804.33 1942.87,1804.33 1966.23,1827.69 2026.35,1827.69 2047.65,1806.38 R31.2@2047.65,1802.08 2051.9,1797.83 v1(2203.7,1797.83) ; U1.59@1907.89,1651.73 U1.60@1893.98,1665.65 1893.98,1658.71 v1(1857.3,1622.03) 1857.3,1531.53 U1.65@1786.1,1460.33 1886.72,1359.72 1886.72,1294.89 1907.89,1273.71 U1.38@1907.89,1268.94 1907.89,1266.93 2000.23,1174.6 2131.45,1174.6 2142.59,1185.73 2172.41,1185.73 2183.55,1174.6 2226.55,1174.6 v1(2226.67,1174.72) ; C13.1@2194.33,1458.73 2197.9,1455.17 2197.9,1409.53 v1(2196.1,1407.73) ; v1(2203.7,1646.93) 2205.13,1645.5 C12.1@2205.13,1600.83 C11.1@2284.53,1600.83 2288.66,1600.83 2327.22,1639.39 2396.23,1639.39 C10.1@2434.79,1600.83 2478.39,1644.43 2680.1,1644.43 2711.8,1676.13 2741.74,1676.13 v3(2742.34,1676.73) ; v1(2673.11,581.42) 2675.79,581.42 2685.45,591.08 C14.1@2712.4,591.08 ; v1(2673.1,685.33) 2701.18,685.33 C15.1@2712.4,674.12 ; P8.2@3000.4,719.63 P8.2@3000.5,719.73 ; P9.1@3000.5,831.37 3025.03,855.91 P1.7@3405.05,855.91 3451.43,855.91 3516.05,791.28 3516.05,735.67 P1.5@3436.29,655.91 ; v3(3203.9,278.83) 3388.47,278.83 3414.5,252.8 3417.6,255.91 v1(3531.83,255.91) ; P1.3@3405.05,455.91 3406.25,454.71 v1(3531.83,454.71) ; P1.5@3415.1,655.91 P1.5@3436.29,655.91 ; v1(3531.83,653.41) 3529.33,655.91 P1.5@3436.29,655.91
  Top Layer w35: P2.8@273.81,1146.98 273.81,1010.53 562.8,721.53 562.8,703.44 R21.2@639.94,626.3
  Top Layer w110: P8.2@3000.5,719.73 P9.1@3000.5,831.37
  Bottom Layer w10: v1(1233.7,283.53) 1236.5,286.33 v1(1236.5,603.43) ; v1(1793.4,1688.03) 1857.3,1624.13 v1(1857.3,1622.03) ; v1(2196.1,1407.73) 2196.1,1370.93 2226.69,1340.35 v1(2226.67,1174.72) ; v1(2203.7,1646.93) v1(2203.7,1797.83) ; v3(2673.11,340.45) v1(2673.11,581.42) ; v1@2673.1,581.43 v1(2673.1,685.33) ; v1(3235.3,1809.33) 3235.3,1811.23 3275,1850.93 R51.1@3280.27,1850.93 3280.27,1849.7 S4.1@3361.84,1768.13 ; v1(3531.83,255.91) v1(3531.83,454.71) v1(3531.83,653.41)
  Bottom Layer w12: S2.1@3361.84,1467.33 3370.53,1467.33 3441.36,1538.16 3441.36,1598.11 3434.33,1605.13 3381.6,1605.13 3361.84,1624.89 S4.1@3361.84,1768.13
  other v1: 2570.55,-107.2 2630.55,-107.2 3170.55,-107.2 2600.55,-47.2 3140.55,-47.2 3200.55,-47.2 2570.55,12.8 2630.55,12.8 3170.55,12.8 2600.55,72.8 3140.55,72.8 3200.55,72.8 2570.55,132.8 2630.55,132.8 3170.55,132.8 2600.55,192.8 3140.55,192.8 3200.55,192.8 2630.55,252.8 2690.55,252.8 2750.55,252.8 2810.55,252.8 2870.55,252.8 3110.55,252.8 3170.55,252.8 2600.55,312.8 2720.55,312.8 2780.55,312.8 2840.55,312.8 2900.55,312.8 3080.55,312.8 3140.55,312.8 3200.55,312.8 2750.55,1572.8 2810.55,1572.8 2870.55,1572.8 2780.55,1632.8 2780.55,1752.8 2840.55,1752.8 2900.55,1752.8
GPIO1: P1.2 R41.2 U1.39 | length 2306.3
  Top Layer w10: U1.39@1921.81,1282.86 1921.81,1282.62 v1(2008.9,1195.53) ; v1(2008.9,467.33) 2023.9,482.33 2679.23,482.33 2682.33,479.23 3135.03,479.23 R41.2@3235.73,378.53 3258.36,355.91 P1.2@3405.05,355.91
  Bottom Layer w10: v1(2008.9,467.33) v1(2008.9,1195.53)
GPIO2: P1.4 R42.2 U1.40 | length 2127.2
  Top Layer w10: U1.40@1935.73,1296.78 1981.68,1250.83 1997.8,1250.83 v1(2031.4,1217.23) ; v1(2031.4,664.33) 2671.77,664.33 2690.7,645.41 2781.64,645.41 2816.21,610.83 3202.99,610.83 R42.2@3235.73,643.57 3289.4,643.57 3318.07,614.91 3346.05,614.91 P1.4@3405.05,555.91
  Bottom Layer w10: v1(2031.4,664.33) v1(2031.4,1217.23)
GPIO3: P1.6 R43.2 U1.41 | length 1949.5
  Top Layer w10: U1.41@1949.65,1310.7 1993.52,1266.83 2011.41,1266.83 2071.51,1206.73 2799.54,1206.73 2819.14,1187.13 3056.86,1187.13 3076.46,1206.73 3220,1206.73 v1(3241.2,1185.53) ; v1(3241.8,819.23) 3235.73,813.16 R43.2@3235.73,776.09 3384.87,776.09 P1.6@3405.05,755.91
  Bottom Layer w10: v1(3241.2,1185.53) 3241.2,819.83 v1(3241.8,819.23)
GPIO4: P1.8 R44.2 U1.42 | length 1802.5
  Top Layer w10: U1.42@1963.57,1324.62 2003.96,1284.23 2023.8,1284.23 v1(2058.8,1249.23) ; v1(2058.6,976.23) 2060.74,974.09 2141.06,974.09 2143.54,976.58 2173.37,976.58 2184.15,965.8 2602,965.8 2610.3,974.09 3170.25,974.09 R44.2@3235.73,908.61 3357.76,908.61 P1.8@3405.05,955.91
  Bottom Layer w10: v1(2058.6,976.23) 2058.8,976.43 v1(2058.8,1249.23)